# EAGLE board 2x2 Platine (EAGLE 9.5.1)
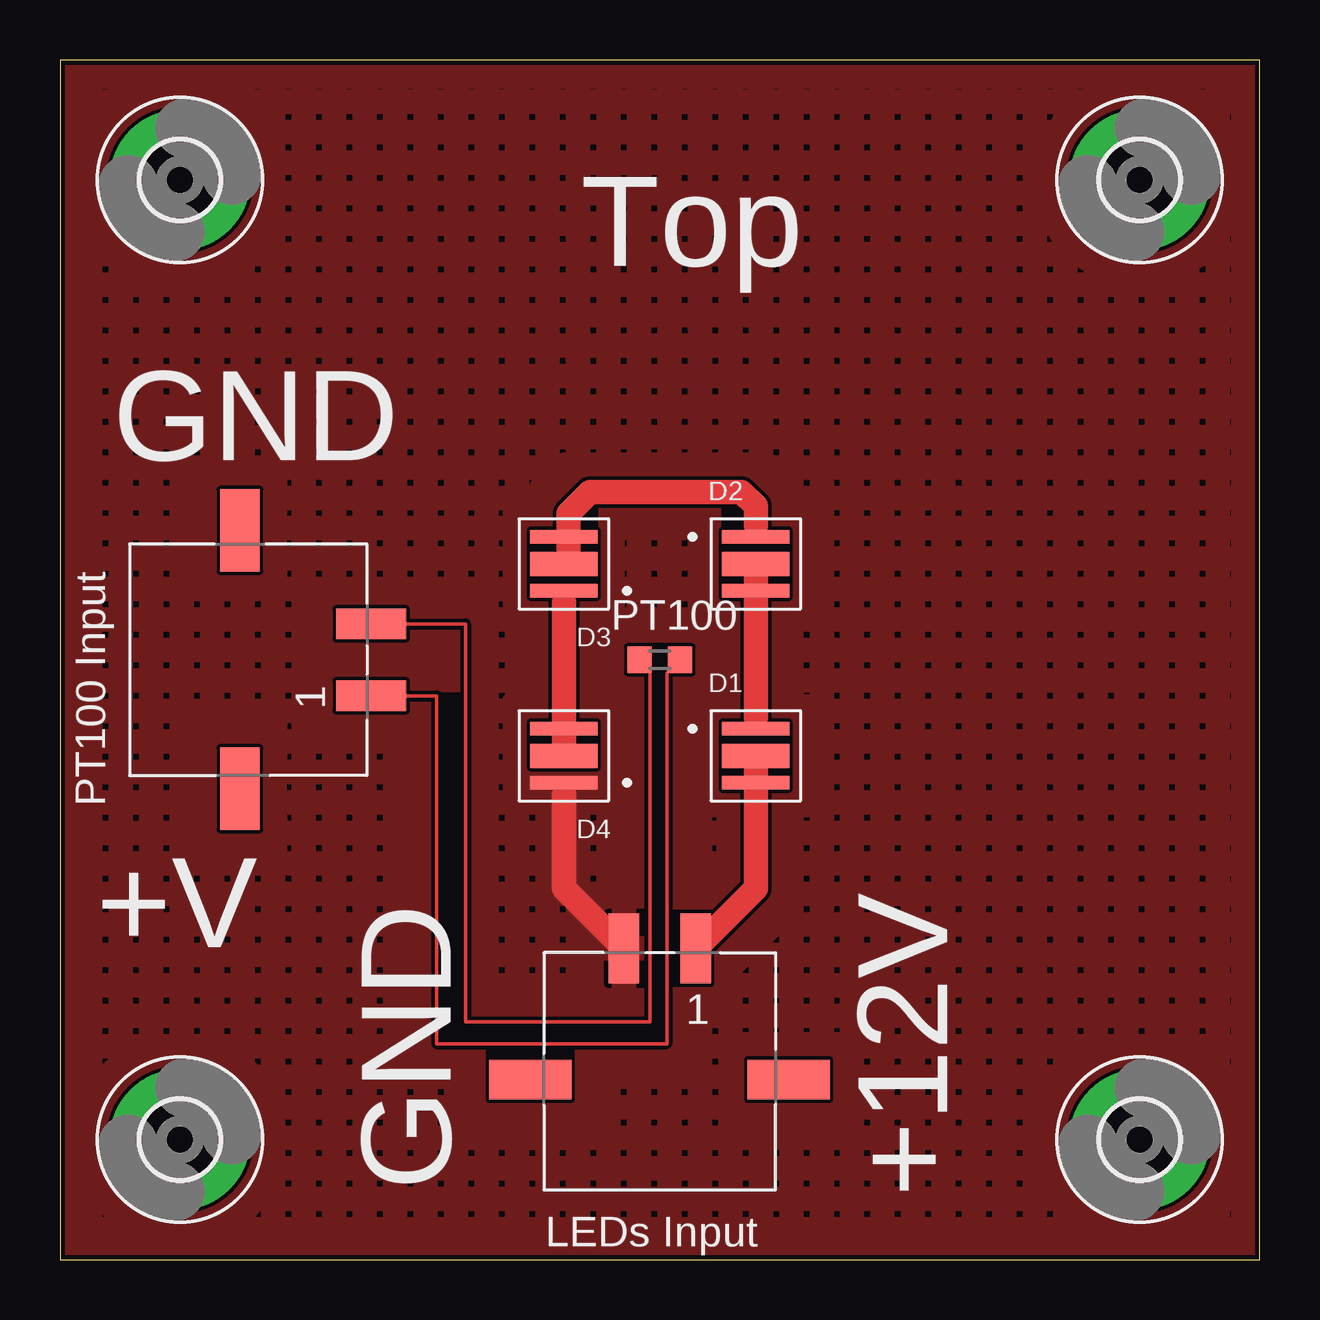
[diagram p0: board, top side]

Size 50 x 50 mm. Coordinates in mm from the lower left corner, seen from the top.
Outline: 0,0 50,0 50,50 0,50 0,0
Copper layers 1: Top 0.018mm
Design rules "Multi-CB_1L_100µm-Tracks_OL35µm *": minimum track width 0.1mm, minimum drill 0.2mm, track to track 0.15mm, track to pad 0.15mm, pad to pad 0.15mm, via to via 0.1mm, smd to smd 0mil, copper to edge 0.2mm, drill to drill 0.2mm, minimum pad ring 0.125mm, minimum via ring 0.1mm, stop-mask expansion 2mil, vias tented up to drill 0.45mm, thermal gap 0.2mm

## Footprints (pad centres in the part's own frame; a part is rotated, then mirrored left to right if it is on the bottom)
LED_SFH_4717AS_A01 = smd 2.8 x 0.55: A1 0,-1.125; C 0,1.125 | smd 2.8 x 1: A2 0,0
3,3-PAD = drill 3.3 pad 5.842: B3,3 0,0
662102145021 = smd 1.27 x 2.92: 1 1.5,5.47; 2 -1.5,5.47 | smd 3.43 x 1.65: M1 5.375,0; M2 -5.395,0
R0603 = smd 1 x 1.1: 1 -0.85,0; 2 0.85,0

## Placement (x,y rotation side)
D1  SFH_4717AS_A01  [LED_SFH_4717AS_A01]  29,21 0 top
D2  SFH_4717AS_A01  [LED_SFH_4717AS_A01]  29,29 0 top
D3  SFH_4717AS_A01  [LED_SFH_4717AS_A01]  21,29 180 top
D4  SFH_4717AS_A01  [LED_SFH_4717AS_A01]  21,21 180 top
H1  MOUNT-PAD-ROUND3.3  [3,3-PAD]  5,5 0 top
H2  MOUNT-PAD-ROUND3.3  [3,3-PAD]  5,45 0 top
H3  MOUNT-PAD-ROUND3.3  [3,3-PAD]  45,5 0 top
H4  MOUNT-PAD-ROUND3.3  [3,3-PAD]  45,45 0 top
J1  [662102145021]  25,7.5 0 top
J2  [662102145021]  7.5,25 270 top
PT100  [R0603]  25,25 0 top

## Library data of the parts
D1-D4 = SFH_4717AS_A01; AVAILABILITY: Unavailable; DESCRIPTION: EMITTER IR; MF: OSRAM Opto; MP: SFH 4717AS A01; PACKAGE: 1515 OSRAM Opto Semiconductors Inc.; PRICE: None
H1-H4 = holes
J1 J2 = 662104145021_Eagle_WR-MPC3_rev19a
PT100 = resistor

## Nets
0V: J2.2 PT100.1
GND: D4.C J1.2
N$1: D1.C D2.A1 D2.A2
N$2: D2.C D3.A1 D3.A2
N$3: D3.C D4.A1 D4.A2
V+: J2.1 PT100.2
VCC: D1.A1 D1.A2 J1.1

## Tracks (layer width: path | path; a pad name or v marks a point on that pad's centre or on a via)
0V
  Top 0.152: J2.2 16.9,26.5 16.9,9.9 24.6,9.9 24.6,24.55 PT100.1
GND
  Top 0.406: 21,19.4 D4.C
  Top 1.016: J1.2 21,15.47 21,19.4
  pour Top (hatched): 0,0 50,0 50,50 0,50
N$1
  Top 0.406: 29,22.6 D1.C
  Top 1.016: D2.A2 D2.A1 29,22.6
N$2
  Top 0.406: 29,30.6 D2.C | D3.A1 D3.A2
  Top 1.016: D3.A2 21.2,29.2 21.2,31.1 22.1,32 28.4,32 29,31.4 29,30.6
N$3
  Top 0.406: 21,27.4 D3.C | D4.A1 D4.A2
  Top 1.016: 21,27.4 D4.A2
V+
  Top 0.152: J2.1 15.7,23.5 15.7,9 25.3,9 25.3,24.45 PT100.2
VCC
  Top 1.016: J1.1 29,15.47 D1.A1 D1.A2

## Text on the board
tNames: Top | GND | PT100 Input | +V | GND | +12V | LEDs Input